# Altium PCB PCB.PcbDoc
Units mil, origin at the board's own origin, x right, y up, seen from the top; angles counter-clockwise.
Board outline 2635 x 2835 mil, 2 copper layers (Top Layer, Bottom Layer); 21 components, 28 nets, 91 pads, 2 vias.
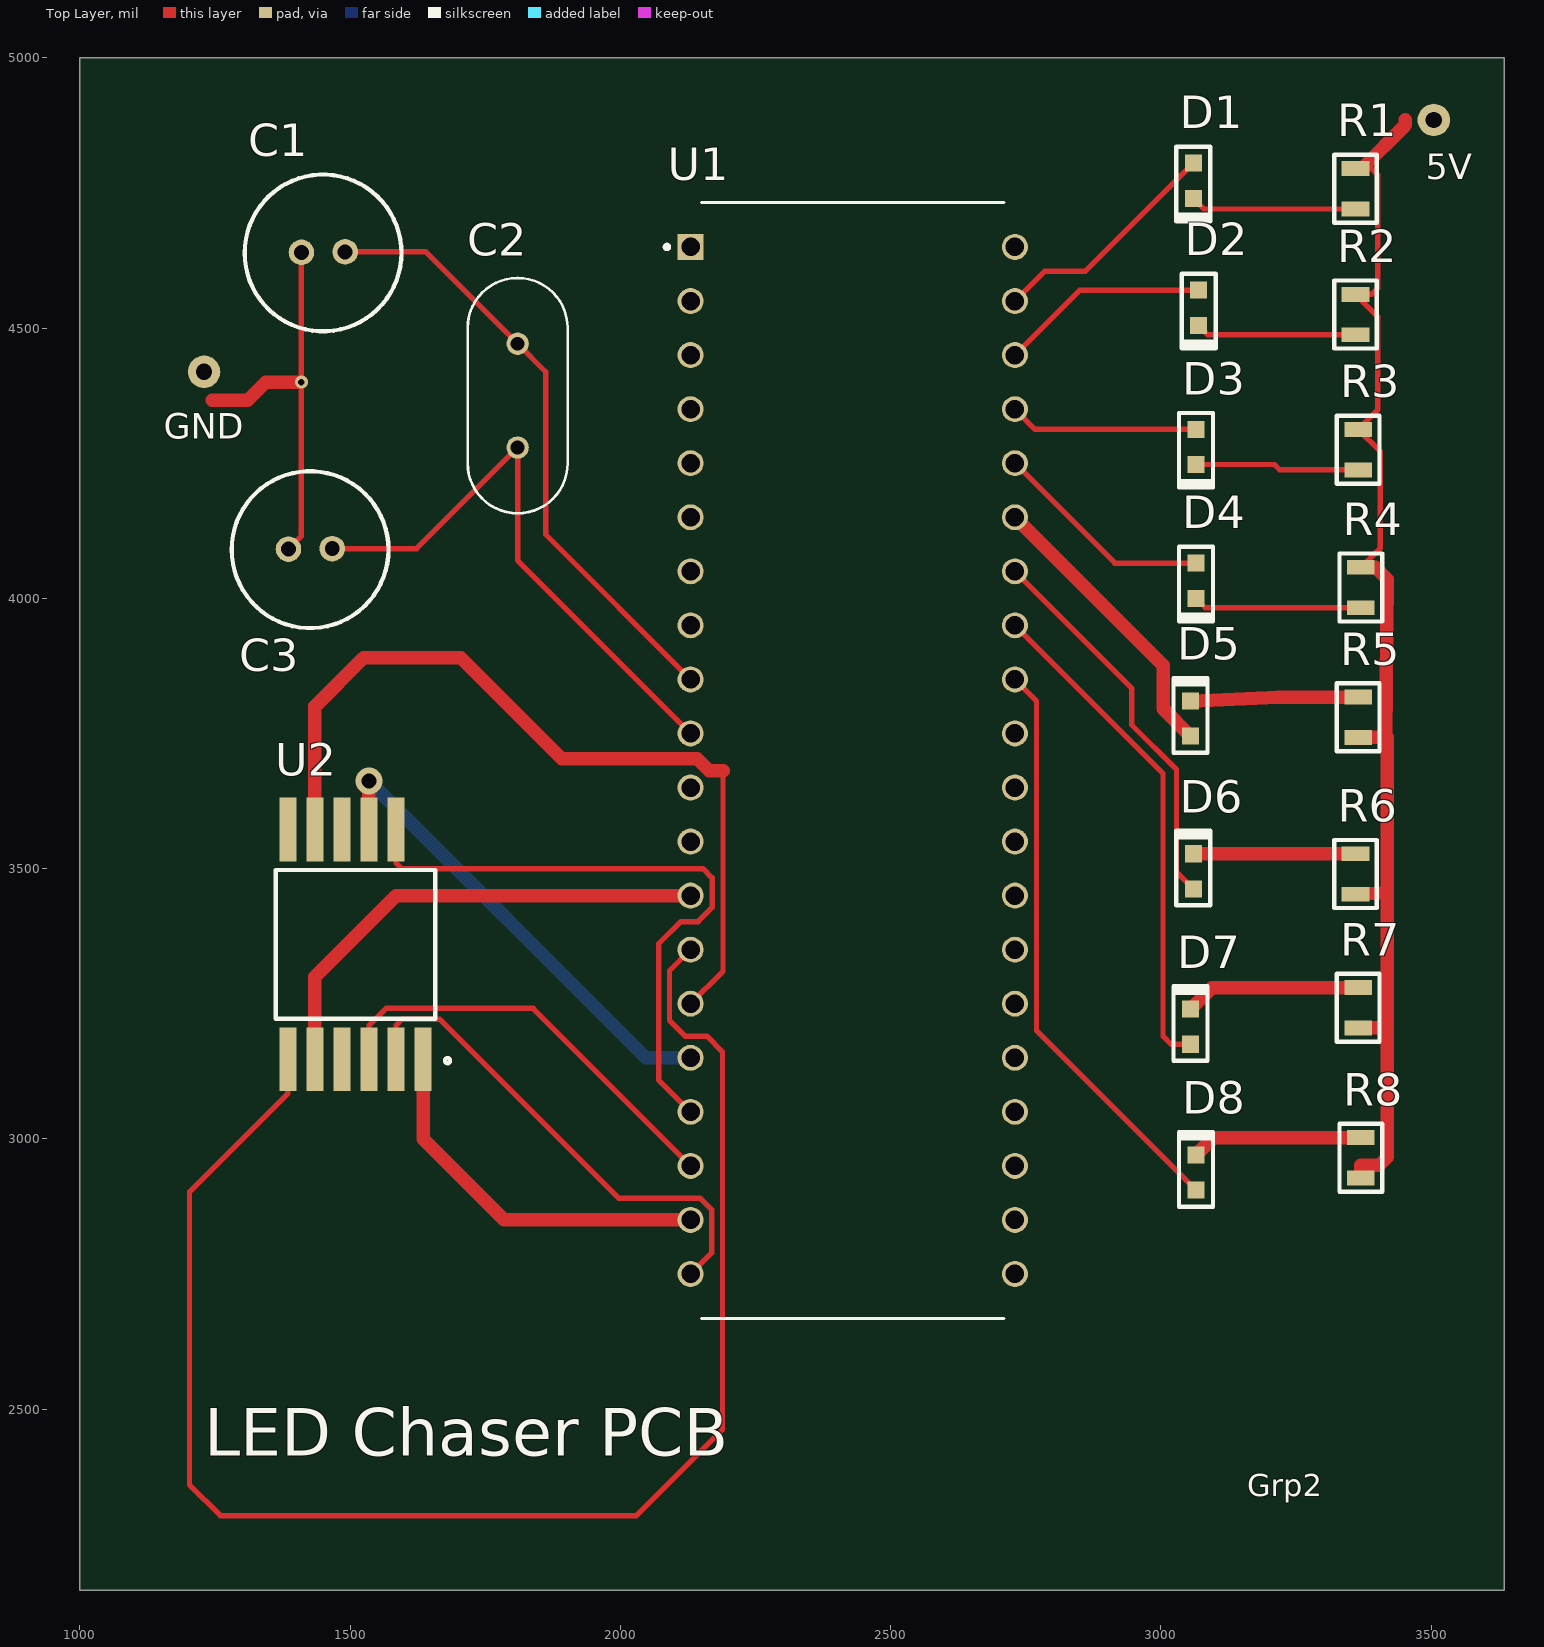
[diagram p0: Top Layer view]
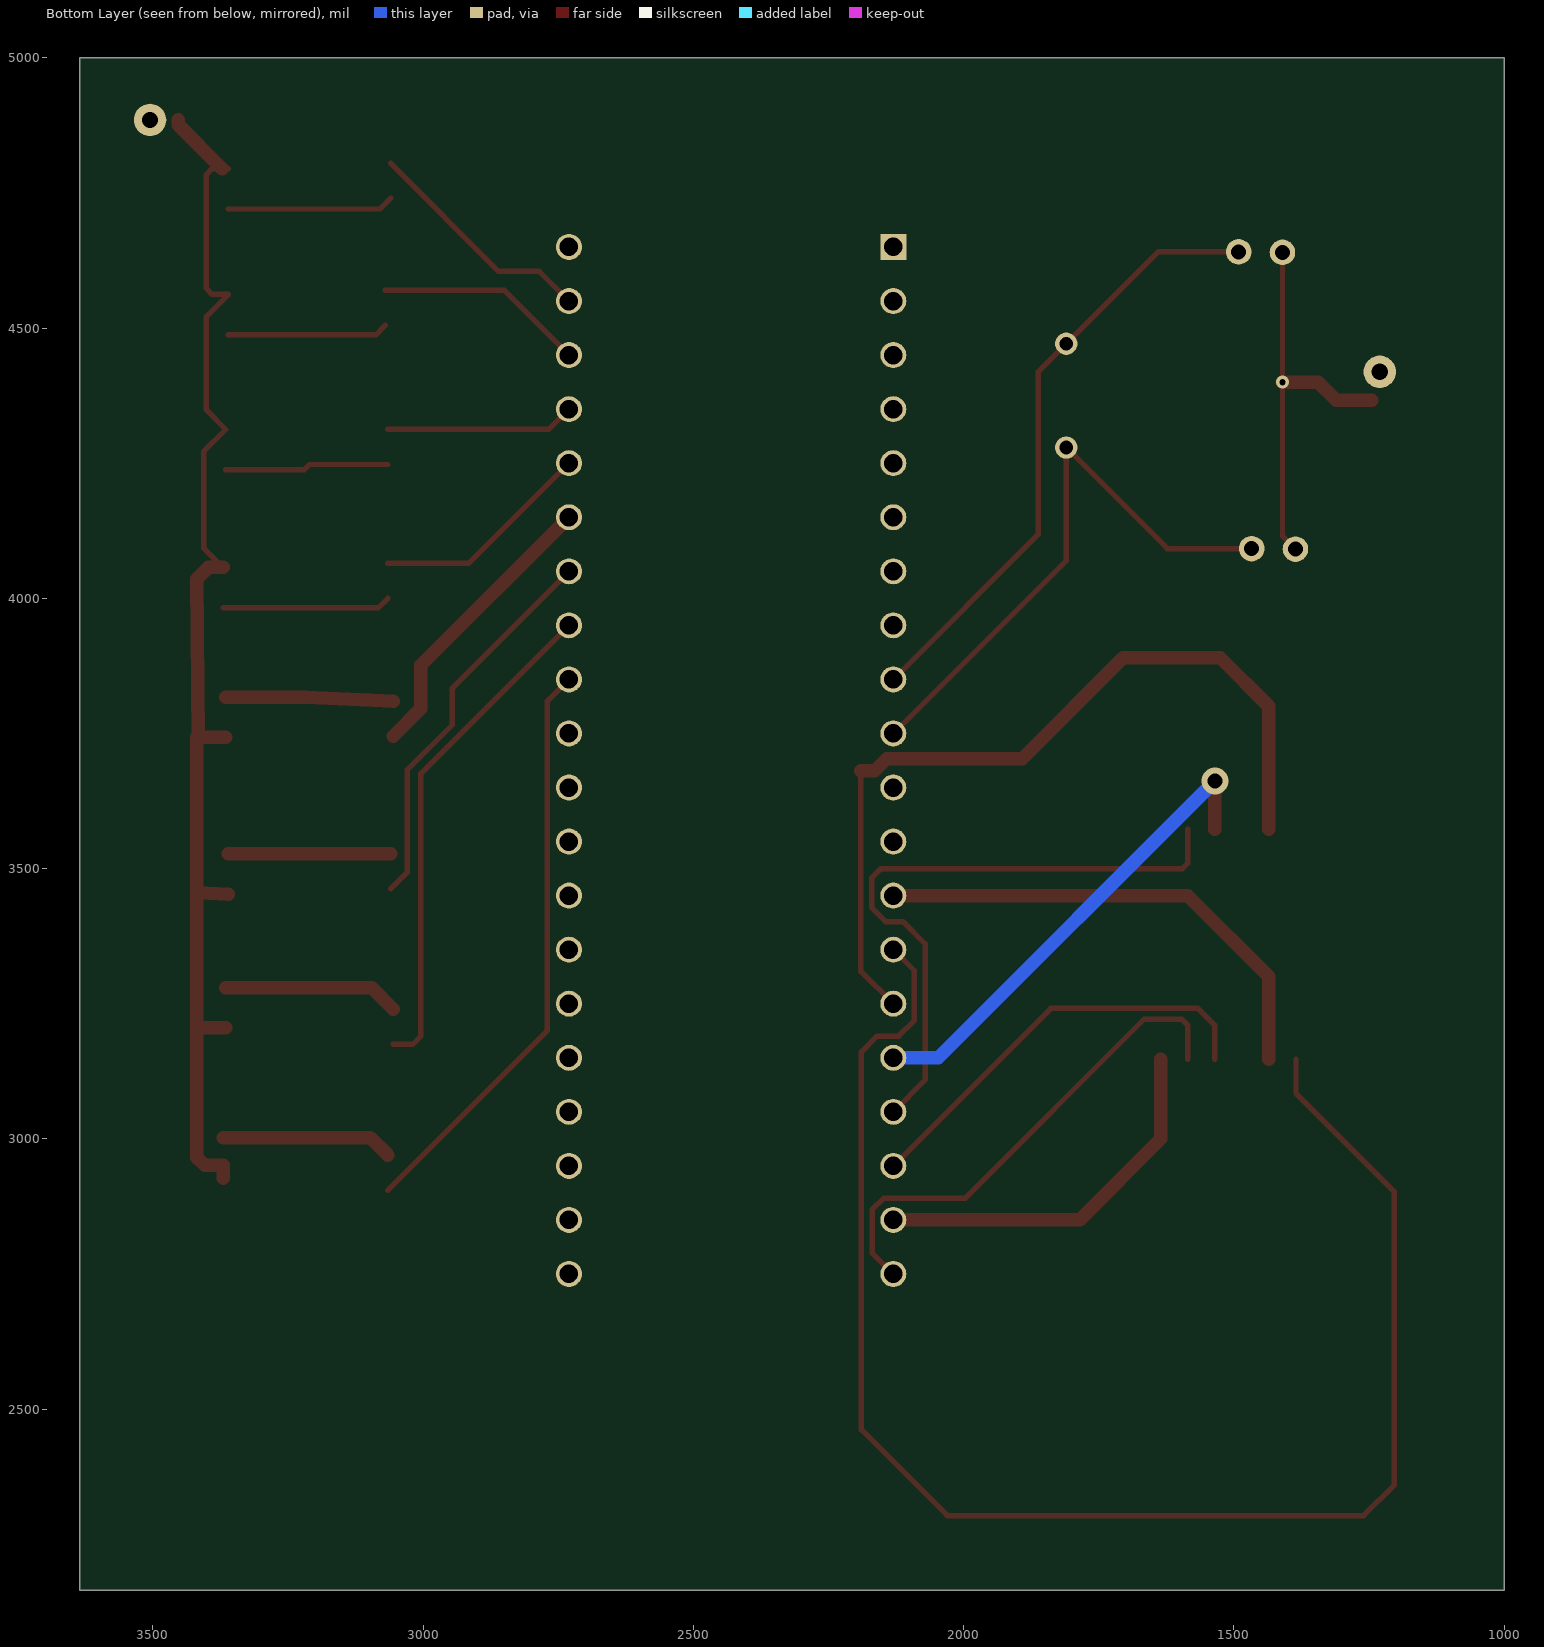
[diagram p1: Bottom Layer view, seen from below]
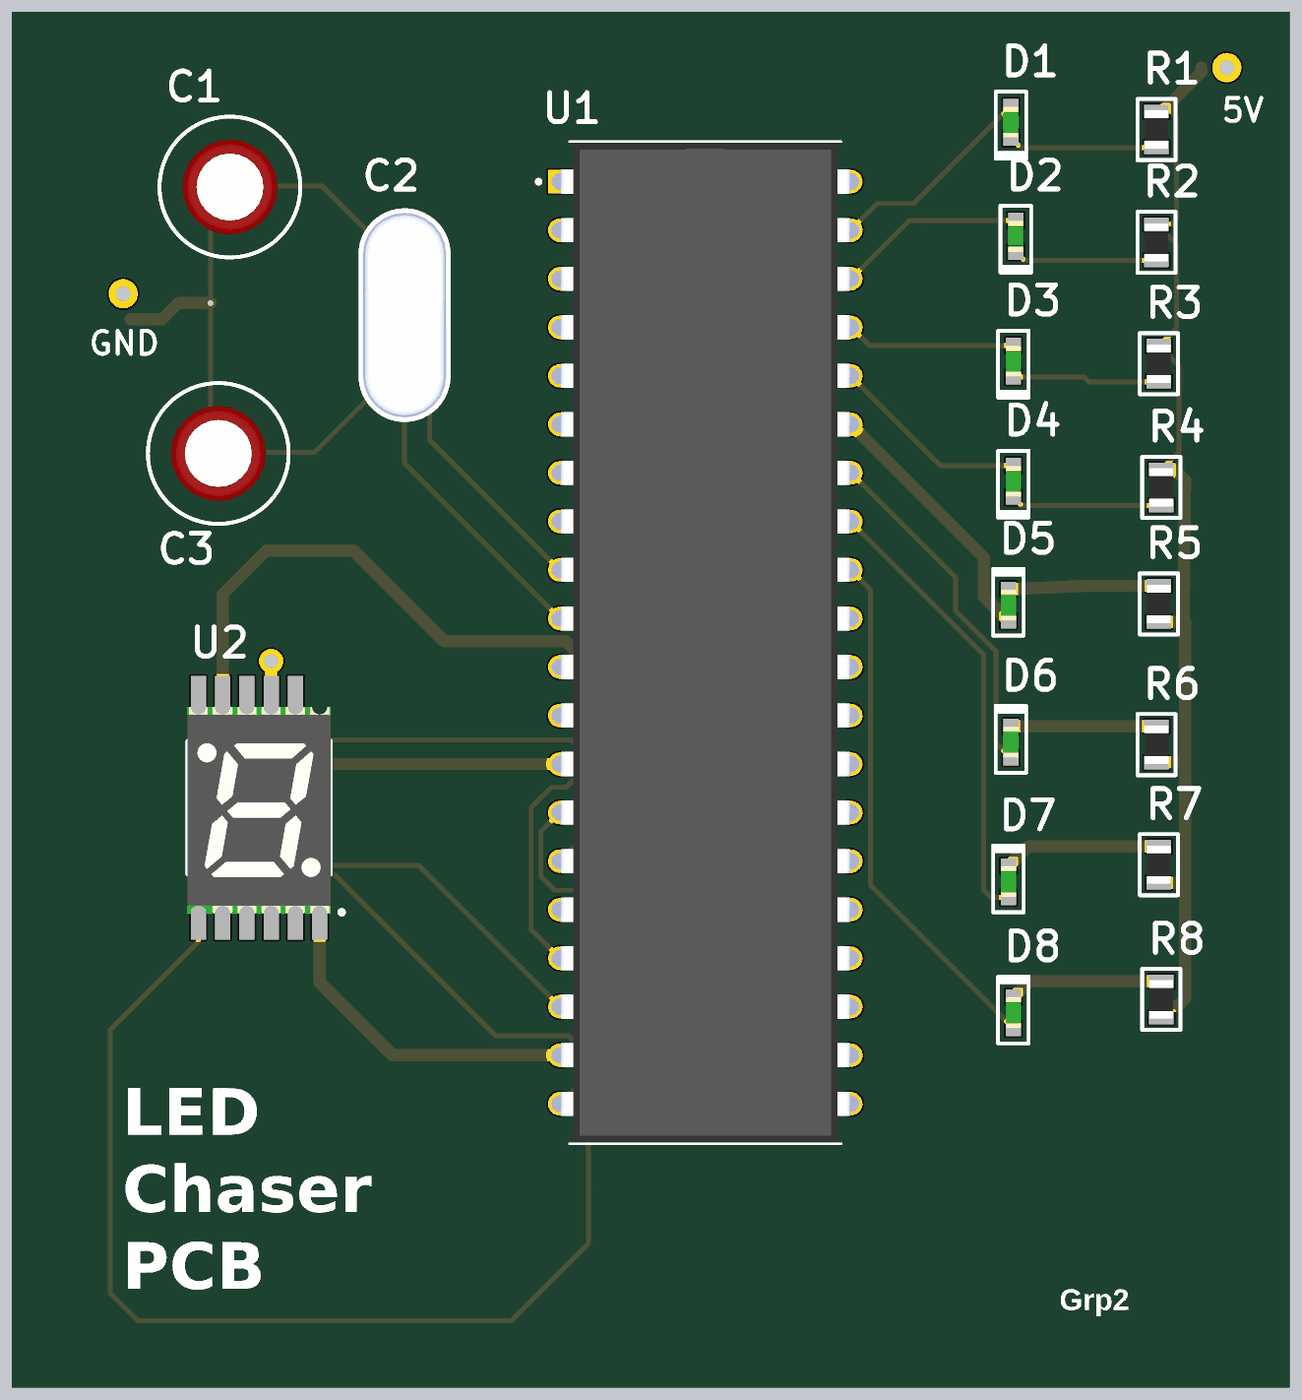
[diagram p2: 3D render of the assembled board from above, using the file's embedded part models]

## Layer stack, top to bottom
Top Solder: solder mask 0.4, Solder Resist, Dk 3.5
Top Layer: signal copper 1.4
Dielectric 1: dielectric 12.6, FR-4, Dk 4.8
Bottom Layer: signal copper 1.4
Bottom Solder: solder mask 0.4, Solder Resist, Dk 3.5

## Board outline
1000,2165 3635,2165 3635,5000 1000,5000

## Design rules (kind name [scope] priority, off if disabled: settings)
Clearance [All] p1: gap=10 ignorepadtopadclearanceinfootprint=FALSE except(0: Arc-Hole Track-Hole SMDPad-Hole THPad-Hole Via-Hole Fill-Hole Poly-Hole Region-Hole Text-Hole)
PolygonConnect [All] p1: connectstyle=Relief reliefconductorwidth=10 reliefentries=4 polygonreliefangle="90 Angle" airgapwidth=10
RoutingVias [All] p1: holewidth=28 width=50 viastyle="Through Hole" minholewidth=28 minwidth=50 maxholewidth=28 maxwidth=50
SolderMaskExpansion [All] p1: expansion=4
Width [All] p1: maxlimit=25 minlimit=25 preferedwidth=25 minimp=50.000000 maximp=50.000000 favimp=50.000000
30 further rules are at their usual default settings.

## Components (designator, comment, footprint, x,y, rotation, side; value= is the part's Value field where it differs from the comment)
C1 "Cap" Cap 1449,4639 r0 top value=33pF
C2 "Crystal" Crystal 1830,4390 r90 top
C3 "Cap" Cap 1425,4090 r0 top value=\
D1 "LED1" LED 3060,4772.48 r90 top
D2 "LED1" LED 3070,4537.52 r90 top
D3 "LED1" LED 3065,4280 r90 top
D4 "LED1" LED 3065,4032.52 r90 top
D5 "LED1" LED 3055,3777.52 r270 top
D6 "LED1" LED 3060,3495 r270 top
D7 "LED1" LED 3055,3207.52 r270 top
D8 "LED1" LED 3065,2937.52 r270 top
R1 "Res1" Res 3360,4757.6 r90 top value=80
R2 "Res1" Res 3360,4525 r90 top value=80
R3 "Res1" Res 3365,4275 r90 top value=80
R4 "Res1" Res 3370,4020 r90 top value=80
R5 "Res1" Res 3365,3780 r270 top value=80
R6 "Res1" Res 3360,3490 r270 top value=80
R7 "Res1" Res 3365,3242.6 r270 top value=80
R8 "Res1" Res 3370,2965 r270 top value=80
U1 "8051" 8051 2435,3705 r0 top
U2 "7segmentLED" Display 1505,3340 r180 top

## Footprints (in the part's own frame and the unit in brackets; to place one, negate y for a bottom-side part, rotate by r counter-clockwise, add the part's x,y. Pads: shape width x height; smd on the part's side, far side on the other; paste and mask are expansions set on the pad)
8051 [mm]
  rect 1.22x1.22 hole 0.87: 1(-7.747,24.003)
  round 1.22 hole 0.87: 2(-7.747,21.463) 3(-7.747,18.923) 4(-7.747,16.383) 5(-7.747,13.843) 6(-7.747,11.303) 7(-7.747,8.763) 8(-7.747,6.223) 9(-7.747,3.683) 10(-7.747,1.143) 11(-7.747,-1.397) 12(-7.747,-3.937) 13(-7.747,-6.477) 14(-7.747,-9.017) 15(-7.747,-11.557) 16(-7.747,-14.097) 17(-7.747,-16.637) 18(-7.747,-19.177) 19(-7.747,-21.717) 20(-7.747,-24.257) 21(7.493,-24.257) 22(7.493,-21.717) 23(7.493,-19.177) 24(7.493,-16.637) 25(7.493,-14.097) 26(7.493,-11.557) 27(7.493,-9.017) 28(7.493,-6.477) 29(7.493,-3.937) 30(7.493,-1.397) 31(7.493,1.143) 32(7.493,3.683) 33(7.493,6.223) 34(7.493,8.763) 35(7.493,11.303) 36(7.493,13.843) 37(7.493,16.383) 38(7.493,18.923) 39(7.493,21.463) 40(7.493,24.003)
  silkscreen extent -8.96,-26.35 6.98,26.1, body extent -8.38,-26.26 8.13,26.01, height 2.03
Cap [mm]
  round 1.2 hole 0.7: 1(-0.991,0.025) 2(1.067,0.051)
  silkscreen extent -3.66,-3.68 3.71,3.68, body extent -2.47,-2.5 2.53,2.5, height 11.01
Crystal [mm]
  round 1.05 hole 0.65: 1(-2.821,0.508) 2(2.059,0.508)
  silkscreen extent -5.91,-1.84 5.15,2.86, body extent -5.91,-1.84 5.14,2.86, height 16.8
Display [mm]
  rect 0.8x3 smd: 1(-3.302,4.892) 2(-2.032,4.892) 3(-0.762,4.892) 4(0.508,4.892) 5(1.778,4.892) 6(3.048,4.892) 7(3.048,-5.908) 8(1.778,-5.908) 9(0.508,-5.908) 10(-0.762,-5.908) 11(-2.032,-5.908)
  silkscreen extent -4.57,-4 3.62,5.08, body extent -3.88,-5.78 3.62,5.02, height 3.76
LED [mm]
  rect 0.8x0.8 smd: 1(-0.825,0) 2(0.825,0)
  silkscreen extent -1.9,-0.8 1.6,0.8, body extent -0.8,-0.4 0.8,0.4, height 0.4
Res [mm]
  rect 0.7x1.3 smd: 1(-0.95,0) 2(0.95,0)
  silkscreen extent -1.6,-1 1.6,1, body extent -1,-0.62 1,0.62, height 0.56

## Part data
C1 C3: "Capacitor", LatestRevisionDate=17-Jul-2002, LatestRevisionNote="Re-released for DXP Platform.", PackageDescription="Radial Cap, Thru-Hole; 2 Leads; 0.3 in Pin Spacing", PackageReference=RAD-0.3, Published=8-Jun-2000, Publisher="Altium Limited"
D1 D2 D3 D4 D5 D6 D7 D8: "Typical RED GaAs LED", LatestRevisionDate=08-Jul-2005, LatestRevisionNote="Mech Layer 1 removed.", PackageDescription="LED; 2 Leads", PackageReference=LED-1, Published=8-Jun-2000, Publisher="Altium Limited"
R1 R2 R3 R4 R5 R6 R7 R8: "Resistor", LatestRevisionDate=17-Jul-2002, LatestRevisionNote="Re-released for DXP Platform.", PackageDescription="Axial Device, Thru-Hole; 2 Leads; 0.3 in Pin Spacing", PackageReference=AXIAL-0.3, Published=8-Jun-2000, Publisher="Altium Limited"

## Free pads (board coordinates)
  round 60 hole 30: 16(3505,4885) 17(1230,4419.06)

## Via types
v1: diameter 23.62, hole 11.81, Top Layer to Bottom Layer, tented both sides, 1 vias
v2: diameter 50, hole 28, Top Layer to Bottom Layer, 1 vias

## Nets (pads, with @x,y where several pads share a name; then routed paths per layer and width w, separated by ;. In a path a pad name is that pad's centre, name@x,y a point inside that pad or via, vN(x,y) a via of type N, cw(c..) or ccw(c..) an arc to the next point about the centre after c; other vN are vias at no path point)
+6V: R1.2 R2.2 R3.2 R4.2 R5.2 R6.2 R7.2 R8.2 | length 2361.1
  Top Layer w10: R1.2 3371.81,4795 3390,4795 3401,4784 3401,4573.4 3390,4562.4 R2.2 3401,4521.4 3401,4348.4 R3.2 3406,4271.4 3406,4093.4 R4.2
  Top Layer w25: R6.2 3416,3455.45 ; R7.2 3416,3205.2 ; R5.2 3416,3742.6 ; R8.2 3370,2951 3404,2951 3419,2966 3419,3742.6 3416,3742.6 ; R4.2 3397,4057.4 3419,4035.4 3416,3742.6 ; R1.2@3371.81,4795 3452.5,4875.69 3452.5,4885
GND: C1.1 C3.1 | length 737.8
  Top Layer w10: C3.1 1410,4115 v1(1410,4400) C1.1
  Top Layer w25: 1245,4366.56 1310.78,4366.56 1344.22,4400 v1(1410,4400)
NetC1_2: C1.2 C2.2 U1.9 | length 1143
  Top Layer w10: C1.2 1640.06,4641 C2.2 1862,4419.06 1862,4118 U1.9
NetC2_1: C2.1 C3.2 U1.10 | length 1081.9
  Top Layer w10: C3.2 1623.06,4092 C2.1 1810,4070 U1.10
NetD1_1: D1.1 R1.1 | length 308.2
  Top Layer w10: D1.1 3079.8,4720.2 R1.1
NetD1_2: D1.2 U1.39 | length 435.6
  Top Layer w10: U1.39 2785,4605 2860.04,4605 D1.2
NetD2_1: D2.1 R2.1 | length 297.2
  Top Layer w10: D2.1 3087.44,4487.6 R2.1
NetD2_2: D2.2 U1.38 | length 389.7
  Top Layer w10: U1.38 2850,4570 D2.2
NetD3_1: D3.1 R3.1 | length 304.1
  Top Layer w10: D3.1 3210,4247.52 3219.92,4237.6 R3.1
NetD3_2: D3.2 U1.37 | length 350.5
  Top Layer w10: U1.37 2767.52,4312.48 D3.2
NetD4_1: D4.1 R4.1 | length 312.2
  Top Layer w10: D4.1 3082.44,3982.6 R4.1
NetD4_2: D4.2 U1.36 | length 411.6
  Top Layer w10: U1.36 2915,4065 D4.2
NetD5_1: D5.1 R5.1 | length 310.2
  Top Layer w25: D5.1 3217.4,3817.4 R5.1
NetD5_2: D5.2 U1.35 | length 539.6
  Top Layer w25: U1.35 3004,3876 3004,3796.04 D5.2
NetD6_1: D6.1 R6.1 | length 300
  Top Layer w25: D6.1 3209,3527.48 3209.08,3527.4 R6.1
NetD6_2: D6.2 U1.34 | length 724.2
  Top Layer w10: U1.34 2945.88,3834.12 2945.88,3766.12 3029,3683 3029,3493.52 D6.2
NetD7_1: D7.1 R7.1 | length 326.6
  Top Layer w25: D7.1 3095,3280 R7.1
NetD7_2: D7.2 U1.33 | length 930.7
  Top Layer w10: U1.33 3004,3676 3004,3190 3018.96,3175.04 D7.2
NetD8_1: D8.1 R8.1 | length 318.4
  Top Layer w25: D8.1 3097.4,3002.4 R8.1
NetD8_2: D8.2 U1.32 | length 1083.7
  Top Layer w10: U1.32 2770,3810 2770,3200.04 D8.2
NetU1_13: U1.13 U2.5 | length 909.7
  Top Layer w25: U2.5 1435,3300 1585,3450 U1.13
NetU1_14: U1.14 U2.6 | length 2906.5
  Top Layer w10: U2.6 1385,3084 1203,2902 1203,2360 1260,2303 2030,2303 2189.02,2462.02 2189.02,3160.98 2160,3190 2120,3190 2090.98,3219.02 2090.98,3310.98 U1.14
NetU1_15: U1.15 U2.8 | length 1562.3
  Top Layer w10: U1.15 2190,3310 2190,3681.29
  Top Layer w25: U2.8 1435,3800 1525,3890 1705,3890 1891.52,3703.48 2142.3,3703.48 2164.5,3681.29 2190,3681.29
NetU1_16: U1.16 U2.10 | length 896.5
  Top Layer w25: U2.10 v2(1535,3662)
  Bottom Layer w25: v2(1535,3662) 2047,3150 U1.16
NetU1_17: U1.17 U2.11 | length 1176
  Top Layer w10: U2.11 1585,3510 1595,3500 2153,3500 2170,3483 2170,3428 2144,3402 2112,3402 2070.98,3360.98 2070.98,3109.02 U1.17
NetU1_18: U1.18 U2.3 | length 791.4
  Top Layer w10: U2.3 1535,3210 1566.46,3241.46 1838.54,3241.46 U1.18
NetU1_19: U1.19 U2.1 | length 704.5
  Top Layer w25: U2.1 1635,3000 1785,2850 U1.19
NetU1_20: U1.20 U2.2 | length 932.5
  Top Layer w10: U2.2 1585,3210 1596.46,3221.46 1665.75,3221.46 1997.21,2890 2148,2890 2169.02,2868.98 2169.02,2789.02 U1.20
pads on no net: U1.1 U1.2 U1.3 U1.4 U1.5 U1.6 U1.7 U1.8 U1.11 U1.12 U1.21 U1.22 U1.23 U1.24 U1.25 U1.26 U1.27 U1.28 U1.29 U1.30 U1.31 U1.40 U2.4 U2.7 U2.9

## Silkscreen, mask and mechanical layers (free items; w line width, h text height)
Top Overlay:
  text "5V" at 3490,4775 h47.24
  text "GND" at 1155,4295 h47.24
  text "LED Chaser PCB" at 1230,2385 h150
  text "Grp2" at 3160,2325 h70